# Altium PCB PhatNRF_MatrixKey.PcbDoc
Units mm, origin at the board's own origin, x right, y up, seen from the top; angles counter-clockwise.
Board outline 99.95 x 104.65 mm, 2 copper layers (Top Layer, Bottom Layer); 12 components, 23 nets, 82 pads, 19 vias.
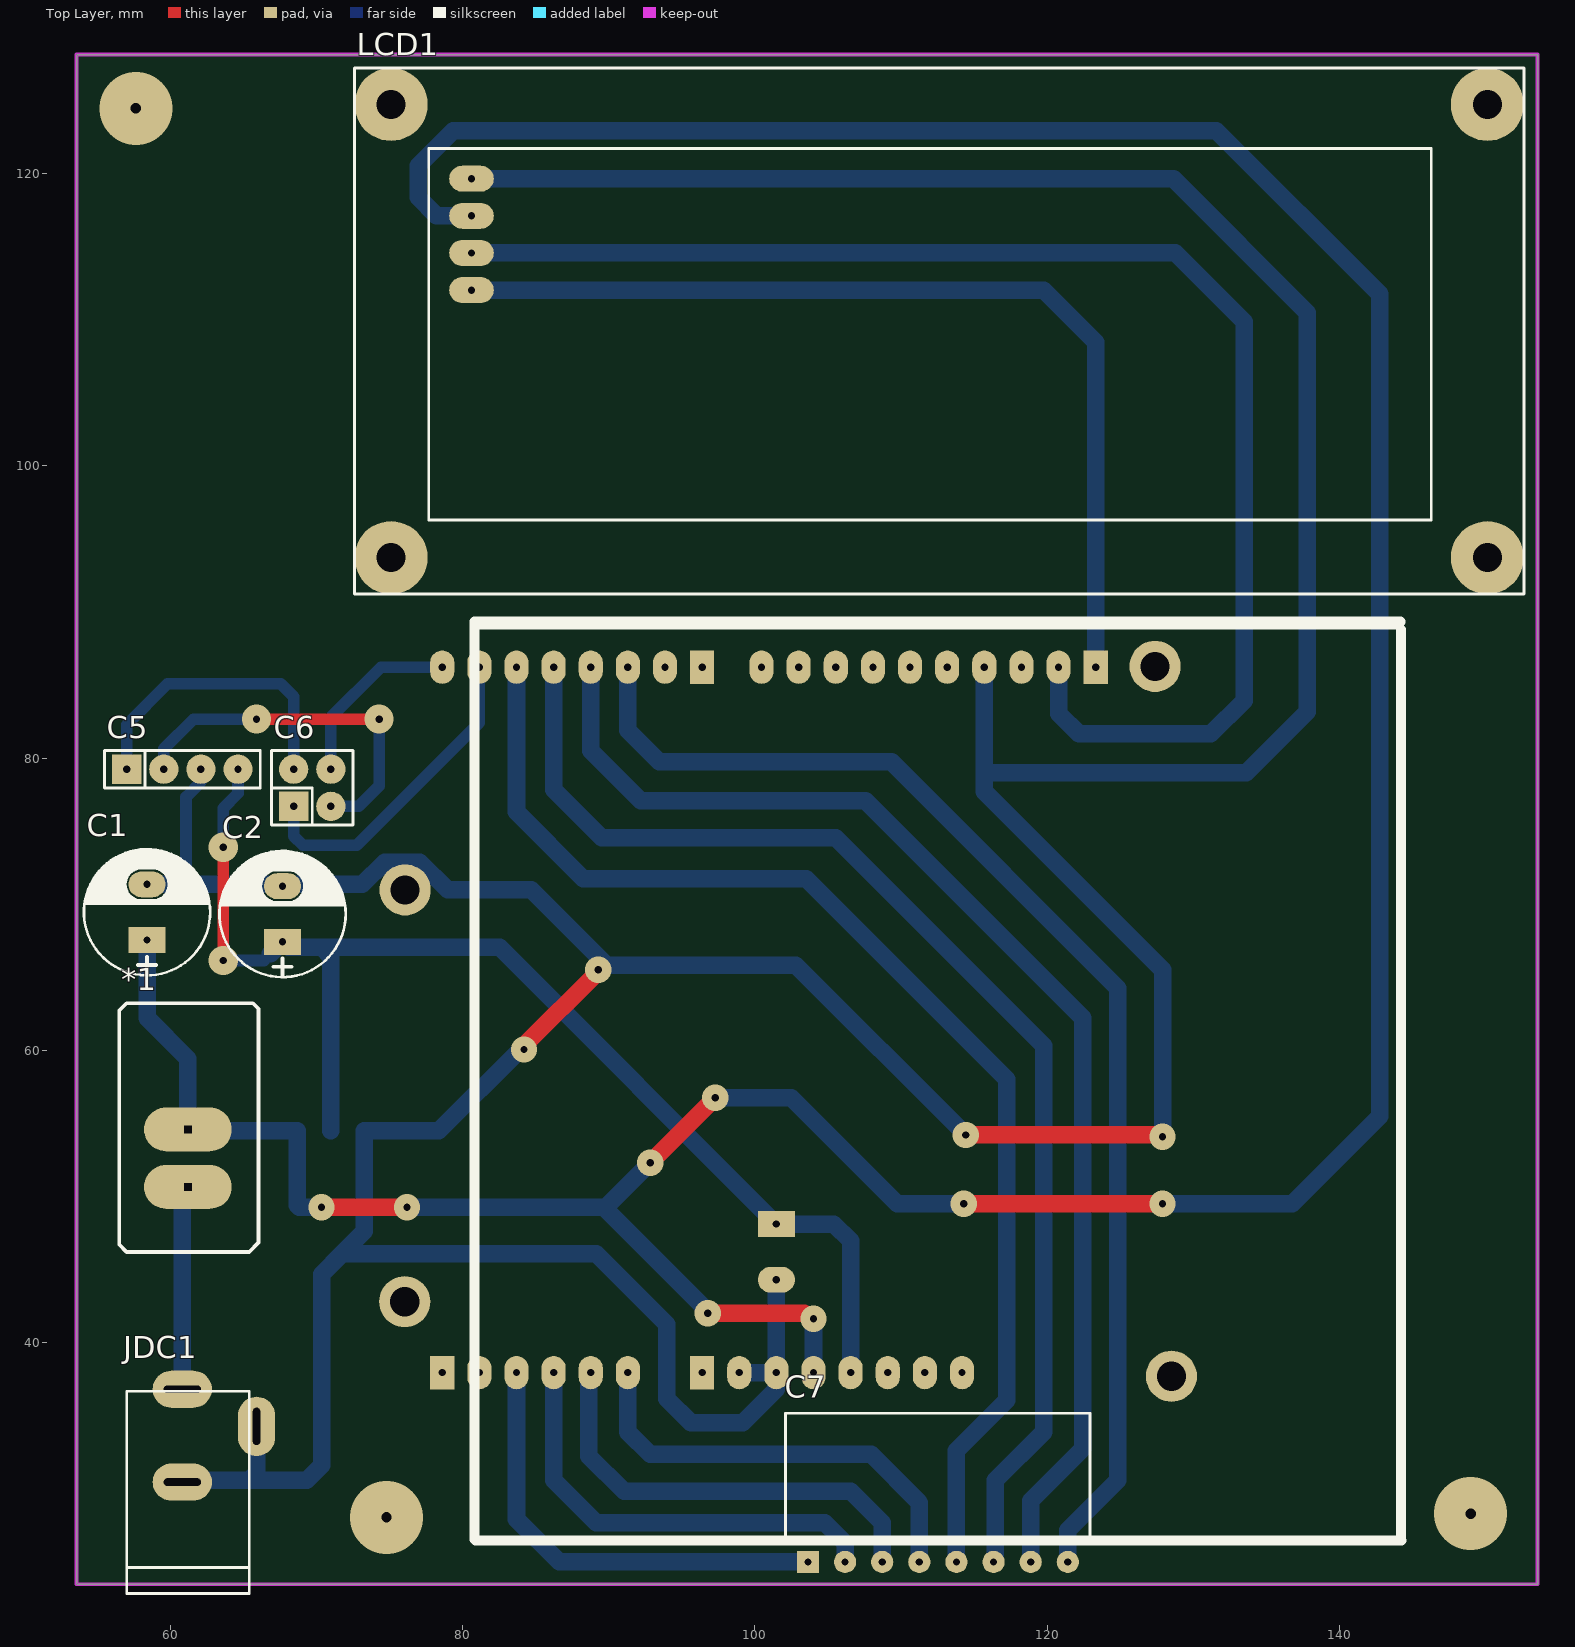
[diagram p0: Top Layer view]
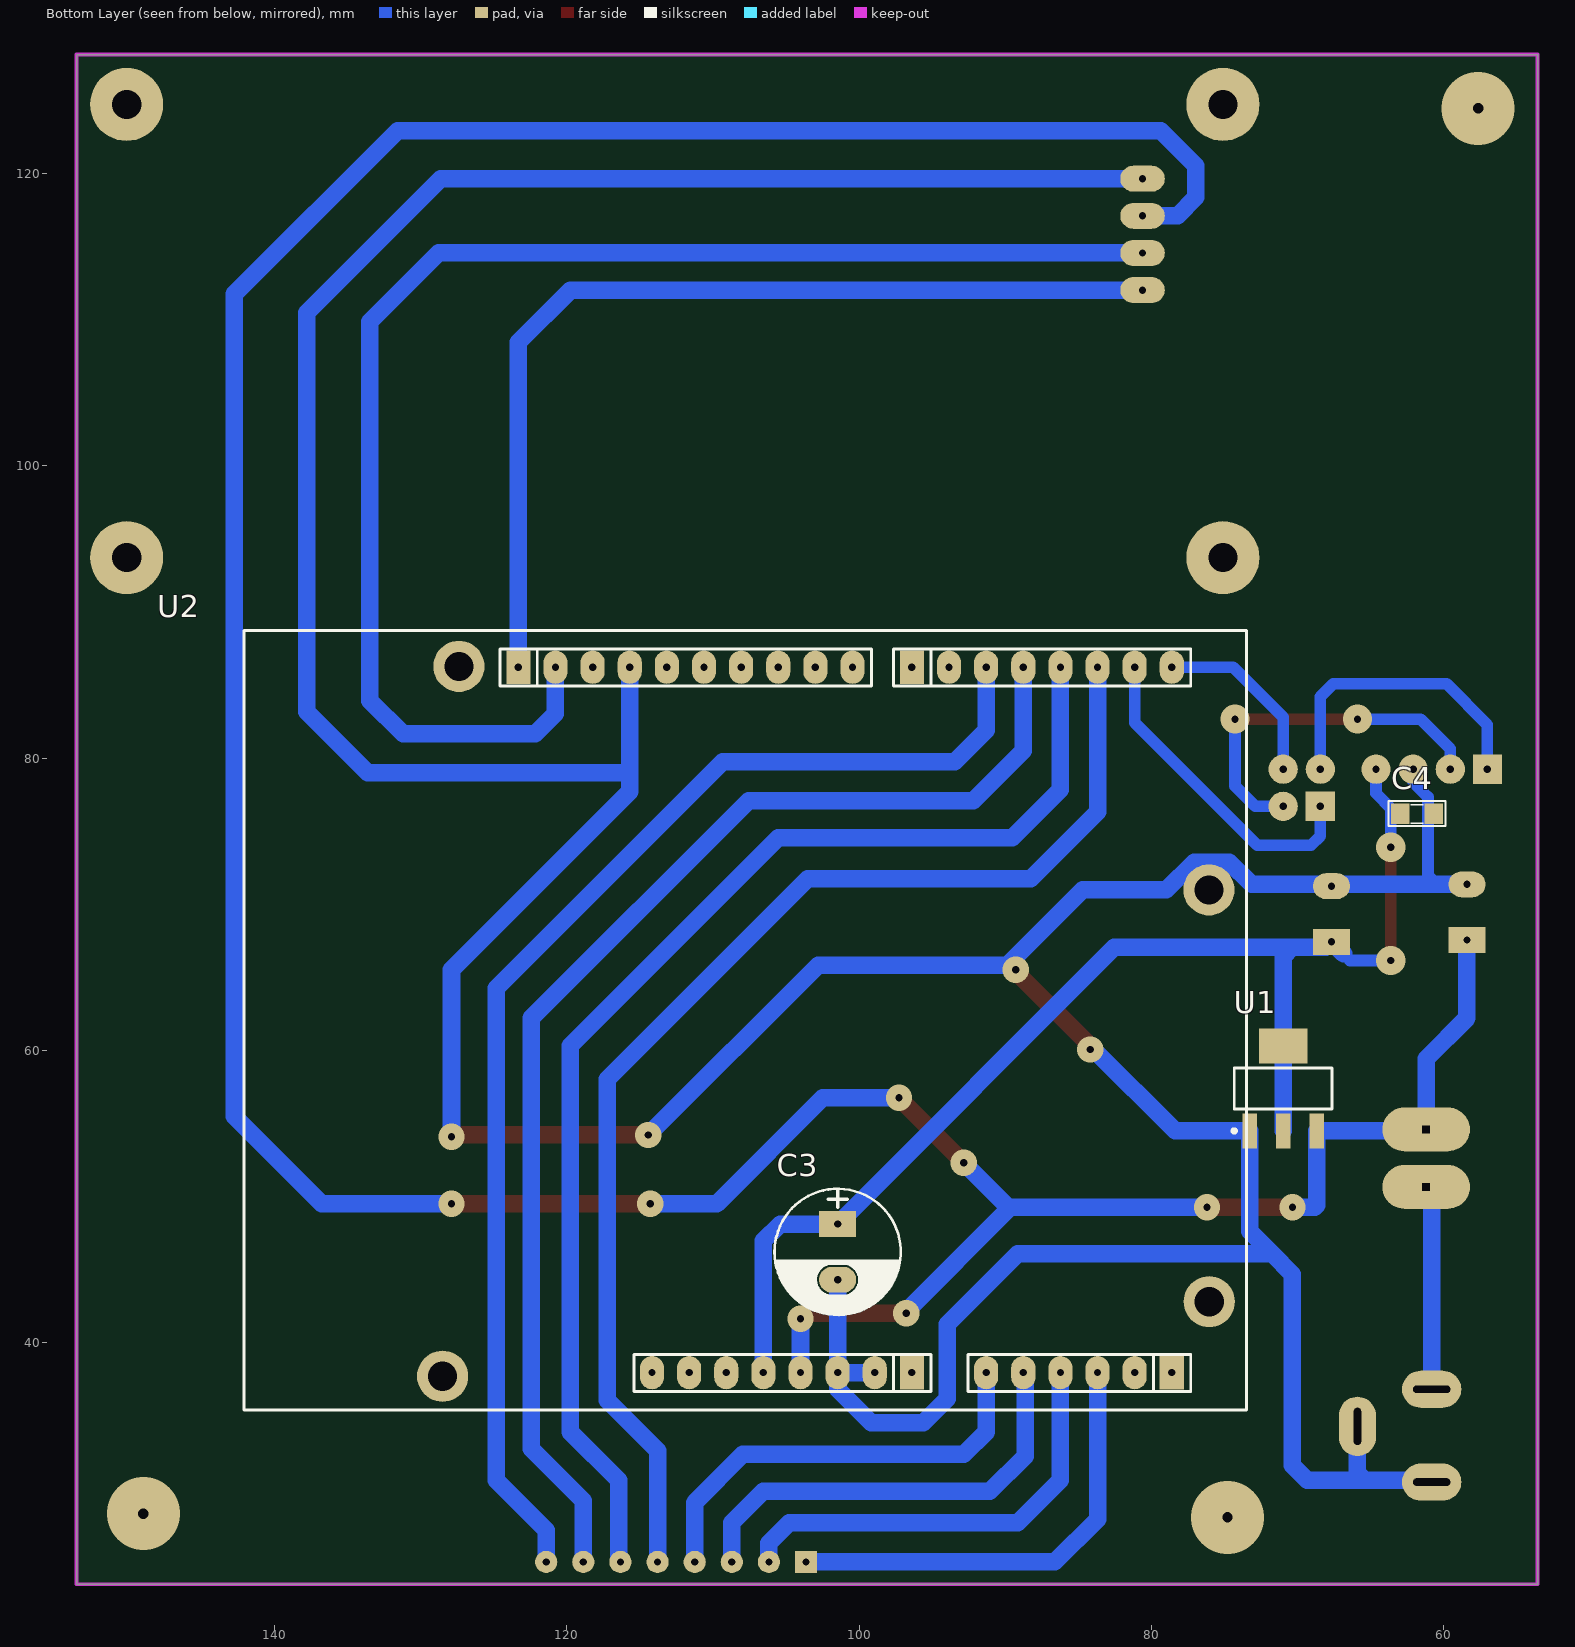
[diagram p1: Bottom Layer view, seen from below]

## Layer stack, top to bottom
Top Solder: solder mask 0.0102, Solder Resist, Dk 3.5
Top Layer: signal copper 0.0356
Dielectric 1: dielectric 0.32, FR-4, Dk 4.8
Bottom Layer: signal copper 0.0356
Bottom Solder: solder mask 0.0102, Solder Resist, Dk 3.5

## Board outline
53.594,23.495 53.594,128.143 153.543,128.143 153.543,23.495

## Design rules (kind name [scope] priority, off if disabled: settings)
Clearance [All] p1: gap=0.5 ignorepadtopadclearanceinfootprint=FALSE
PolygonConnect [All] p1: connectstyle=Relief reliefconductorwidth=0.254 reliefentries=4 polygonreliefangle="90 Angle" airgapwidth=0.254
RoutingVias [All] p1: holewidth=0.711 width=1.8 viastyle="Through Hole" minholewidth=0.711 minwidth=1.8 maxholewidth=0.711 maxwidth=1.8
SolderMaskExpansion [All] p1: expansion=0.102
Width [All] p1: maxlimit=1.2 minlimit=0.5 preferedwidth=0.8
30 further rules are at their usual default settings.

## Classes and differential pairs
component class PhatNRF_MatrixKey: *1 C1 C2 C3 C4 C6 C7 JDC1 LCD1 U1 U2

## Components (designator, comment, footprint, x,y, rotation, side; value= is the part's Value field where it differs from the comment)
*1 "SW bap benh" "SW bapbenh" 61.214,52.578 r180 top
C1 "100uF/35V" CP1.5/3.4 58.42,67.564 r90 top value=100uF/35V/50V
C2 "100uF/35V" CP1.5/3.4 67.691,67.437 r90 top value=100uF/35V/50V
C3 "100uF/35V" CP1.5/3.4 101.473,48.133 r270 bottom value=100uF/35V/50V
C4 "103" SM-0805 61.849,76.2 r0 bottom
C5 "JP4" JP4-C1T 57.023,79.248 r0 top
C6 "JP2x2" JP2-C2T 69.723,77.978 r0 top
C7 "JP8" JP8-C1C 112.522,25.019 r0 top
JDC1 "Jac DC" DC0 63.373,33.655 r90 top
LCD1 "LCD1602_I2C" LCD1602_I2C 68.803,75.831 r0 top locked
U1 "AMS1117" SOT223 70.993,57.404 r180 bottom
U2 "KIT ARDUINO R3" "Arduino UNO R3 - v1" 105.893,61.316 r90 bottom

## Footprints (in the part's own frame and the unit in brackets; to place one, negate y for a bottom-side part, rotate by r counter-clockwise, add the part's x,y. Pads: shape width x height; smd on the part's side, far side on the other; paste and mask are expansions set on the pad)
"Arduino UNO R3 - v1" [mil]
  oval 90x65 hole 19.68: 0-RX(981,-1074) 1-TX(981,-974) 2(981,-874) 3V3(-919,26) 4(981,-674) 5V(-919,-74) 8(981,-214) 12(981,186) 13(981,286) A0(-919,-574) A1(-919,-674) A2(-919,-774) A3(-919,-874) A4(-919,-974) AREF(981,486) GND(-919,-274) GND(-919,-174) GND(981,386) IOREF(-919,226) NC(-919,326) RESET(-919,126) SDA(981,586) ~3(981,-774) ~5(981,-574) ~6(981,-474) ~9(981,-114) ~10(981,-14) ~11(981,86)
  rect 90x65 hole 19.68: 7(981,-374) A5(-919,-1074) SCL(981,686) Vin(-919,-374)
  round 137.8 hole 78.74: GND(-929,890) GND(381,-1174) GND(983,846) ""(-728,-1175)
  oval 90x65 all layers, no hole: ""(-919,876) ""(981,826)
  oval 78.74x0 all layers, no hole: ""(-719,-1174)
  round 0 all layers, no hole: ""(381,-1174)
  silkscreen extent -1020,-1275 1080,1425, body extent -1021,-1298 1085,1668, height 336
CP1.5/3.4 [mm] "Tu hoa 220->470uF,16V, 470uF/16V,25V"
  rect 1.778x2.54 hole 0.5: 1(0,0)
  oval 1.778x2.54 hole 0.5: 2(3.81,0)
  silkscreen extent -2.41,-4.32 6.22,4.32, body extent -2.16,-4 5.84,4, height 11.33
DC0 [mm] "Jac DC input"
  oval 2.54x4.064 hole 0.5 slot 2.54 at 90 deg: 1(3.175,2.54) 2(-3.175,2.54)
  oval 4.064x2.54 hole 0.5 slot 2.54 at 0 deg: 3(0.635,-2.54)
  silkscreen extent -10.79,-2.03 3.05,6.35, body extent -10.42,-2.67 3.4,6.84, height 11.02
JP2-C2T [mm] "4 pins, dual row, straight, gold plating"
  rect 2x2 hole 0.5: 1(-1.27,-1.27)
  round 2 hole 0.5: 2(1.27,-1.27) 3(1.27,1.27) 4(-1.27,1.27)
  silkscreen extent -2.79,-2.54 2.79,2.54, body extent -2.79,-2.54 2.79,2.54, height 8.51
JP4-C1T [mm] "4 row, straight, gold plating"
  rect 2x2 hole 0.5: 1(0,0)
  round 2 hole 0.5: 2(2.54,0) 3(5.08,0) 4(7.62,0)
  silkscreen extent -1.52,-1.27 9.14,1.27, body extent -1.52,-1.25 9.14,1.25, height 8.51
JP8-C1C [mm] "08p 1 row Right angle"
  rect 1.52x1.52 hole 0.5: 1(-8.89,0)
  round 1.52 hole 0.5: 2(-6.35,0) 3(-3.81,0) 4(-1.27,0) 5(1.27,0) 6(3.81,0) 7(6.35,0) 8(8.89,0)
  silkscreen extent -10.41,1.52 10.41,10.17, body extent -10.41,-0.25 10.41,10.05, height 2.51
LCD1602_I2C [mm]
  round 5 hole 2: 1(6.311,17.895) 1(6.311,48.895) 1(81.311,17.895) 1(81.311,48.895)
  oval 3.048x1.778 hole 0.5: 1(11.811,43.815) 2(11.811,41.275) 3(11.811,38.735) 4(11.811,36.195)
  round 0 all layers, no hole: ""(6.311,48.895)
  silkscreen extent 3.81,15.39 83.81,51.4, body extent 3.95,14.94 84.45,51.43, height 18.14
SM-0805 [mil] "Compoment SMD 80x50mil"
  rect 50x55 smd: 1(-45,0) 2(45,0)
  silkscreen extent -77,-34 76,33, body extent -40,-25 40,25, height 24
SOT223 [mm]
  rect 1x2.4 smd: 1(-2.3,-2.9) 2(0,-2.9) 3(2.3,-2.9)
  rect 3.3x2.4 smd: 4(0,2.9)
  silkscreen extent -3.48,-3.02 3.35,1.4, body extent -3.25,-3.56 3.25,3.4, height 1.68
"SW bapbenh" [mm]
  oval 6x3 hole 0.5 square: 1(0,1.905) 2(0,-2.032)
  silkscreen extent -4.83,-10.67 4.7,6.35

## Part data
C1 C2 C3: library part CP3, "Cap 100uF/35V - 470uF/16V", Description 1="1000uF/6,3V - 470uF/16V - 330uF - 25V", Description 2="220uF/35V - 100uF/50V - 63V - 4,7uF/200V", Description 3="22uF => 33uF100V - 3,3uF => 4,7uF/250V", Description 4="2,2uF =>3,3uF/350 - 2,2uF/400V - 1uF/450V"
C4: library part CM, "Cap SMD"
C5: "WR-PHD 2.54 mm Angled Socket Header", Manufacturer="Würth Elektronik eiSos GmbH", partNo=613004143121, ComponentLink1 Description=Manufacturer, ComponentLink1URL=http://www.we-online.com, ComponentLink2 Description=Datasheet, ComponentLink2URL=http://katalog.we-online.de/em/datasheet/6130xx143121.pdf, Created by="Karrer Zheng", Created Date="29 March 2013", NoPins=04
C6: "WR-PHD 2.54 mm Dual Socket Header", Manufacturer="Würth Elektronik eiSos GmbH", partNo=61300421821, ComponentLink1 Description=Manufacturer, ComponentLink1URL=http://www.we-online.com, ComponentLink2 Description=Datasheet, ComponentLink2URL=http://katalog.we-online.de/em/datasheet/6130xx21821.pdf, Created by="Karrer Zheng", Created Date="29 March 2013", NoPins=04
C7: "WR-PHD 2.54 mm Angled Socket Header", Manufacturer="Würth Elektronik eiSos GmbH", partNo=613008143121, ComponentLink1 Description=Manufacturer, ComponentLink1URL=http://www.we-online.com, ComponentLink2 Description=Datasheet, ComponentLink2URL=http://katalog.we-online.de/em/datasheet/6130xx143121.pdf, Created by="Karrer Zheng", Created Date="29 March 2013", NoPins=08
JDC1: library part DCIN, "Jac DC input"
U1: library part AMS117
U2: "ARDUINO  R3 ATMEGA328, ARDUINO UNO, EVAL BOARD"

## Via types
v1: diameter 1.8, hole 0.5, Top Layer to Bottom Layer, 12 vias
v2: diameter 2, hole 0.5, Top Layer to Bottom Layer, 4 vias
v3: diameter 5, hole 0.711, Top Layer to Bottom Layer, 3 vias

## Nets (pads, with @x,y where several pads share a name; then routed paths per layer and width w, separated by ;. In a path a pad name is that pad's centre, name@x,y a point inside that pad or via, vN(x,y) a via of type N, cw(c..) or ccw(c..) an arc to the next point about the centre after c; other vN are vias at no path point)
3V3: C2.1 C3.1 C4.2 C5.4 U1.2 U1.4 U2.3V3 | length 87.3
  Top Layer w0.8: v2(63.627,66.167) v2(63.627,73.914)
  Bottom Layer w0.8: v2(63.627,66.167) 66.421,66.167 C2.1@66.865,66.611 ; v2(63.627,73.914) 63.627,76.581 64.643,77.597 C5.4
  Bottom Layer w1.2: C2.1@66.865,66.611 C2.1 68.072,67.056 70.358,67.056 ; U1.2 U1.4 70.993,66.421 70.358,67.056 ; U2.3V3 106.553,46.99 105.41,48.133 C3.1 82.55,67.056 70.358,67.056
ARDUINO_RX: C6.3 U2.0-RX | length 12.6
  Bottom Layer w0.8: C6.3 70.993,82.804 74.422,86.233 U2.0-RX
ARDUINO_TX: C6.1 U2.1-TX | length 22.3
  Bottom Layer w0.8: C6.1 68.453,74.676 69.088,74.041 72.771,74.041 81.153,82.423 U2.1-TX
CE: U2.~9
CSN: U2.~10
GND: C1.2 C2.2 C3.2 C4.1 C5.3 JDC1.2 JDC1.3 LCD1.1@80.614,119.646 U1.1 U2.GND@76.073,70.993 U2.GND@98.933,37.973 U2.GND@101.473,37.973 U2.GND@115.697,86.233 | length 342.8
  Top Layer w1.2: v1(84.201,60.071) 84.201,60.325 89.281,65.405 v1(89.281,65.532) ; v1(114.427,54.229) 127.762,54.229 v1(127.889,54.102)
  Bottom Layer w0.8: 60.452,71.374 61.087,72.009 61.087,77.343 62.103,78.359 C5.3
  Bottom Layer w1.2: C1.2 60.452,71.374 73.152,71.374 74.676,72.898 77.089,72.898 78.994,70.993 84.709,70.993 v1@89.725,65.977 ; JDC1.2 60.96,30.607 65.405,30.607 ; JDC1.3 65.913,31.115 65.405,30.607 ; LCD1.1@80.614,119.646 128.639,119.646 137.795,110.49 137.795,83.185 133.604,78.994 115.824,78.994 115.697,78.867 ; v1(84.201,60.071) 83.947,60.071 78.38,54.504 U1.1 73.293,47.639 71.755,46.101 ; v1@89.852,65.849 102.806,65.849 v1(114.427,54.229) ; U2.GND@98.933,37.973 U2.GND@101.473,37.973 ; C3.2 U2.GND@101.473,37.973 ; U2.GND@115.697,86.233 115.697,78.867 ; v1(127.889,54.102) 127.889,65.532 115.697,77.724 115.697,78.867 ; 65.405,30.607 69.342,30.607 70.358,31.623 70.358,44.704 71.755,46.101 ; 71.755,46.101 89.154,46.101 93.98,41.275 93.98,36.195 95.631,34.544 99.187,34.544 101.473,36.83 U2.GND@101.473,37.973
MISO: U2.12
MOSI: U2.~11
Net*1_1: *1.1 JDC1.1 | length 14
  Bottom Layer w1.2: JDC1.1 60.833,50.292 *1.1
NetC5_1: C5.1 C6.4 | length 21
  Bottom Layer w0.8: C5.1 57.023,82.296 59.817,85.09 67.564,85.09 68.453,84.201 C6.4
NetC5_2: C5.2 C6.2 | length 25.4
  Top Layer w0.8: v2(65.913,82.677) v2(74.295,82.677)
  Bottom Layer w0.8: C5.2 59.563,80.645 61.595,82.677 v2(65.913,82.677) ; C6.2 72.898,76.708 74.295,78.105 v2(74.295,82.677)
NetC7_1: C7.1 U2.A3 | length 31.2
  Bottom Layer w1.2: U2.A3 83.693,27.94 86.614,25.019 C7.1
NetC7_2: C7.2 U2.A2 | length 30.4
  Bottom Layer w1.2: U2.A2 86.233,30.607 89.154,27.686 104.775,27.686 106.172,26.289 C7.2
NetC7_3: C7.3 U2.A1 | length 30.4
  Bottom Layer w1.2: U2.A1 88.646,37.846 88.646,32.258 91.059,29.845 106.553,29.845 108.712,27.686 C7.3
NetC7_4: C7.4 U2.A0 | length 30.1
  Bottom Layer w1.2: U2.A0 91.313,33.909 92.837,32.385 107.95,32.385 111.252,29.083 C7.4
NetC7_5: C7.5 U2.2 | length 85.4
  Bottom Layer w1.2: U2.2 83.693,76.327 88.265,71.755 103.505,71.755 117.221,58.039 117.221,36.068 113.792,32.639 C7.5
NetC7_6: C7.6 U2.~3 | length 85.9
  Bottom Layer w1.2: U2.~3 86.233,77.851 89.535,74.549 105.537,74.549 119.761,60.325 119.761,33.909 116.459,30.607 116.459,25.146 C7.6
NetC7_7: C7.7 U2.4 | length 85.6
  Bottom Layer w1.2: U2.4 88.773,80.518 92.202,77.089 107.569,77.089 122.428,62.23 122.428,32.766 118.872,29.21 C7.7
NetC7_8: C7.8 U2.~5 | length 85.8
  Bottom Layer w1.2: U2.~5 91.313,81.915 93.472,79.756 109.347,79.756 124.841,64.262 124.841,30.607 121.412,27.178 C7.8
NetLCD1_3: LCD1.3 U2.SDA | length 98.1
  Bottom Layer w1.2: LCD1.3 128.766,114.566 133.477,109.855 133.477,83.947 131.191,81.661 122.174,81.661 120.777,83.058 U2.SDA
NetLCD1_4: LCD1.4 U2.SCL | length 66.4
  Bottom Layer w1.2: LCD1.4 119.749,112.026 123.317,108.458 U2.SCL
SCK: U2.13
VCC: *1.2 C1.1 LCD1.2 U1.3 U2.5V | length 265
  Top Layer w1.2: v1(70.358,49.276) v1(76.2,49.276) ; v1(92.837,52.324) v1(97.282,56.769) ; v1(96.774,42.037) 103.378,42.037 103.886,41.529 v1(104.013,41.656) ; v1(114.3,49.53) v1(127.889,49.53)
  Bottom Layer w1.2: C1.1 58.42,62.23 61.214,59.436 *1.2 61.32,54.504 U1.3 68.693,49.417 68.834,49.276 v1(70.358,49.276) ; v1(76.2,49.276) 89.662,49.276 ; LCD1.2 78.22,117.106 76.962,118.364 76.962,120.523 79.375,122.936 131.572,122.936 142.748,111.76 142.748,55.499 136.779,49.53 v1(127.889,49.53) ; v1(92.837,52.324) 89.789,49.276 89.662,49.276 ; v1(96.774,42.037) 96.901,42.037 89.662,49.276 ; v1(97.282,56.769) 102.489,56.769 109.728,49.53 v1(114.3,49.53) ; U2.5V v1(104.013,41.656)
pads on no net: LCD1. LCD1.1@75.114,93.726 LCD1.1@75.114,124.726 LCD1.1@150.114,93.726 LCD1.1@150.114,124.726 U2. U2.7 U2.8 U2.A4 U2.A5 U2.AREF U2.GND@127.381,86.284 U2.GND@128.499,37.719 U2.IOREF U2.NC U2.RESET U2.Vin U2.~6
copper on no net:
  other v3: 74.803,28.067 148.971,28.321 57.658,124.46

## Keep-outs
Keep-Out Layer:
  the board outline again, w0.254

## Silkscreen, mask and mechanical layers (free items; w line width, h text height)
Top Overlay:
  lines w0.7: 80.823,26.568 80.823,89.332 144.145,89.332 ; 80.899,26.492 144.221,26.492 ; 81.255,89.154 143.967,89.154 ; 144.145,26.568 144.196,26.619 144.196,88.798